# Altium PCB Battery_Monitor_4Cell.pcbdoc
Units mm, origin at the board's own origin, x right, y up, seen from the top; angles counter-clockwise.
Board outline 152.4 x 101.6 mm, 2 copper layers (Top Layer, Bottom Layer); 30 components, 24 nets, 102 pads, 0 vias.
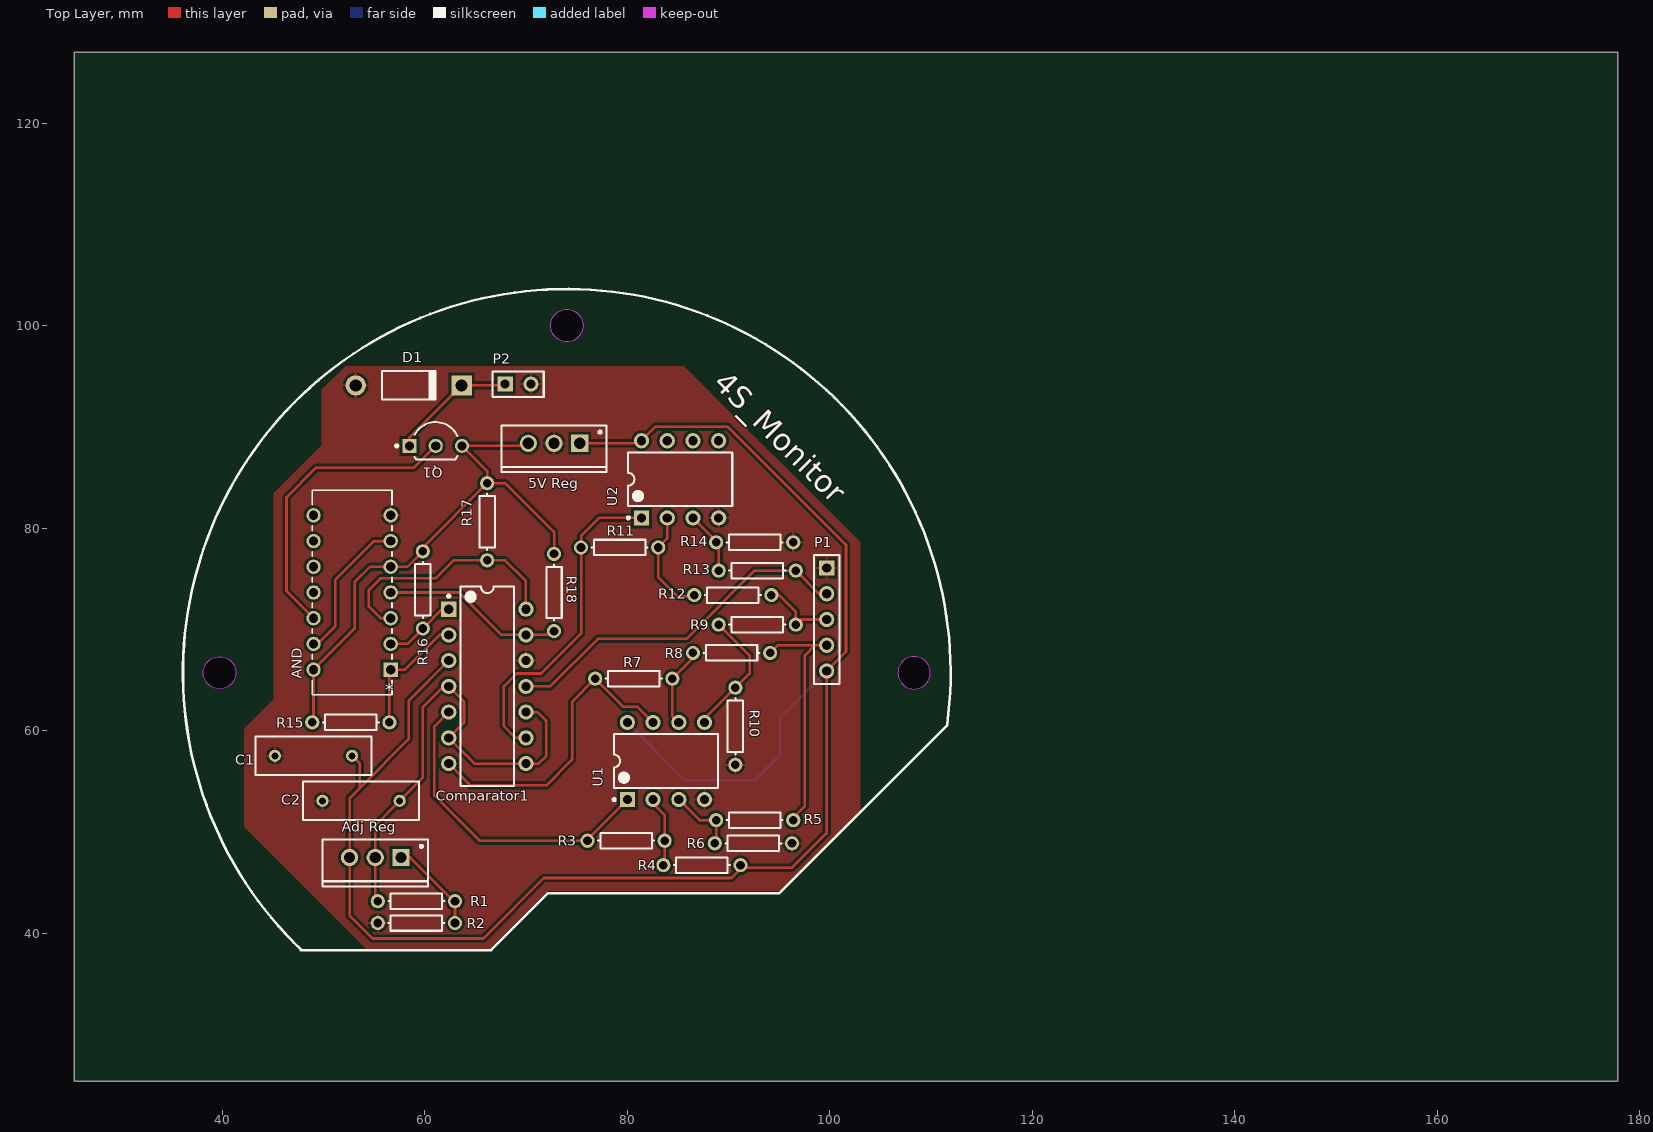
[diagram p0: Top Layer view]
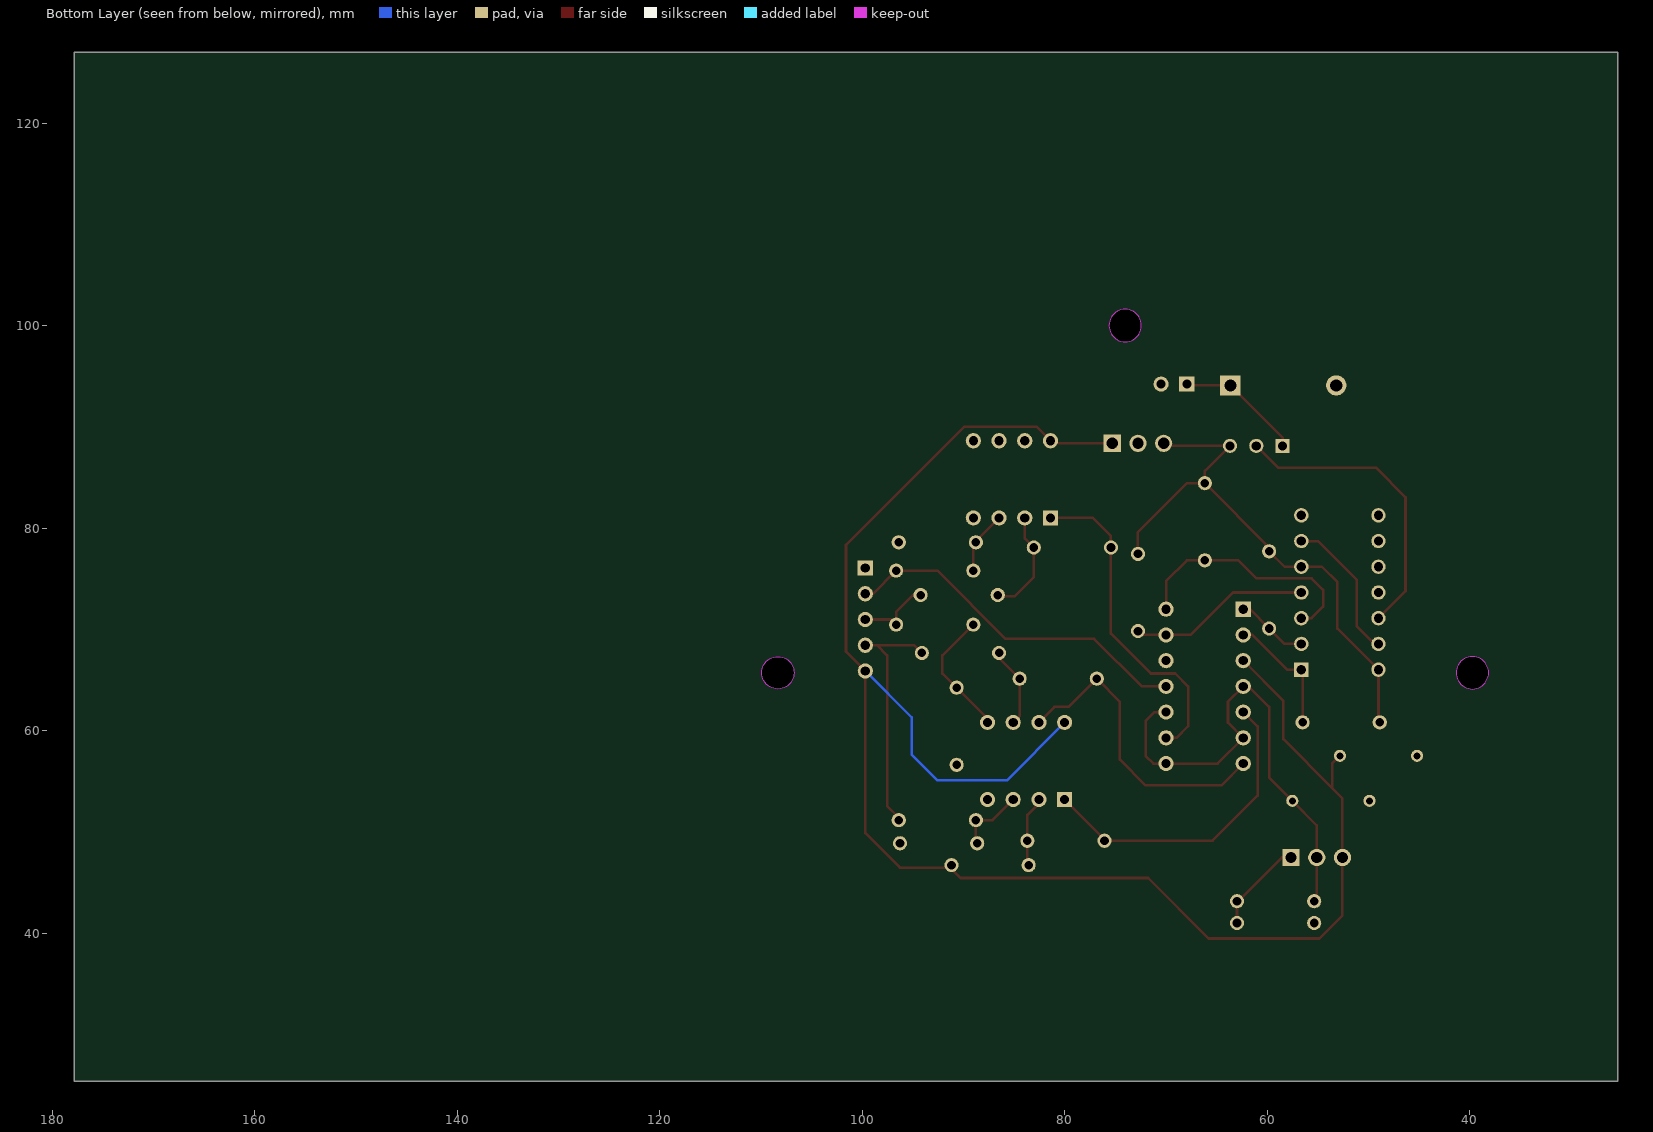
[diagram p1: Bottom Layer view, seen from below]

## Layer stack, top to bottom
Top Solder: solder mask 0.0102, Solder Resist, Dk 3.5
Top Layer: signal copper 0.0356
Dielectric 1: dielectric 0.32, FR-4, Dk 4.8
Bottom Layer: signal copper 0.0356
Bottom Solder: solder mask 0.0102, Solder Resist, Dk 3.5

## Board outline
25.4,25.4 177.8,25.4 177.8,127 25.4,127
cut-out: 39.742,64.13 cw(c39.742,65.73) 38.142,65.73 cw(c39.742,65.73) 39.742,67.33 cw(c39.742,65.73) 41.342,65.73 cw(c39.742,65.73)
cut-out: 106.722,65.73 ccw(c108.322,65.73) 108.322,64.13 ccw(c108.322,65.73) 109.922,65.73 ccw(c108.322,65.73) 108.322,67.33 ccw(c108.322,65.73)
cut-out: 74.032,98.42 cw(c74.032,100.02) 72.432,100.02 cw(c74.032,100.02) 74.032,101.62 cw(c74.032,100.02) 75.632,100.02 cw(c74.032,100.02)

## Design rules (kind name [scope] priority, off if disabled: settings)
Clearance [All] p1: gap=0.254
PolygonConnect [All] p1: connectstyle=Relief reliefconductorwidth=0.254 reliefentries=4 polygonreliefangle="90 Angle" airgapwidth=0.254
RoomDefinition Battery_Monitor_4Cell [InComponentClass('Battery_Monitor_4Cell')] p1: confinementstyle=ConfineIn formatcopy=TRUE lockcomponents=FALSE outline 154.051,116.84 22.733,116.84 22.733,26.67 154.051,26.67
RoutingVias [All] p1: holewidth=0.711 width=1.27 viastyle="Through Hole" minholewidth=0.711 minwidth=1.27 maxholewidth=0.711 maxwidth=1.27
SolderMaskExpansion [All] p1: expansion=0.102
Width [All] p1: maxlimit=0.254 minlimit=0.254 preferedwidth=0.254
30 further rules are at their usual default settings.

## Components (designator, comment, footprint, x,y, rotation, side; value= is the part's Value field where it differs from the comment)
"5V Reg" "L7805ABV" TO220 72.771,88.392 r180 top
"Adj Reg" "LM317T" TO-220 55.118,47.498 r180 top
AND "Part Number: SN54HC11J" J14 49.022,81.28 r180 top
C1 "Cap" RAD-0.3 49.022,57.531 r0 top
C2 "Cap" RAD-0.3 53.721,53.086 r180 top
Comparator1 "LM339N" N14A 66.184,64.389 r0 top
D1 "Diode 1N4002" DO-41 58.42,94.107 r0 top
P1 "Header 5" HDR1X5 99.695,76.073 r270 top
P2 "Relay" HDR1X2 67.945,94.234 r0 top
Q1 "PN2222ARLRA" ONSC-TO-92-3-29-11_AM_BL 61.087,88.138 r0 top
R1 "Res1" AXIAL-0.3 59.182,43.18 r180 top
R2 "Res1" AXIAL-0.3 59.182,41.021 r0 top
R3 "Res1" AXIAL-0.3 79.883,49.149 r180 top
R4 "Res1" AXIAL-0.3 87.376,46.736 r180 top
R5 "Res1" AXIAL-0.3 92.583,51.181 r180 top
R6 "Res1" AXIAL-0.3 92.456,48.895 r180 top
R7 "Res1" AXIAL-0.3 80.645,65.151 r180 top
R8 "Res1" AXIAL-0.3 90.297,67.691 r180 top
R9 "Res1" AXIAL-0.3 92.837,70.485 r180 top
R10 "Res1" AXIAL-0.3 90.678,60.452 r90 top
R11 "Res1" AXIAL-0.3 79.248,78.105 r180 top
R12 "Res1" AXIAL-0.3 90.424,73.406 r180 top
R13 "Res1" AXIAL-0.3 92.837,75.819 r180 top
R14 "Res1" AXIAL-0.3 92.583,78.613 r180 top
R15 "Res1" AXIAL-0.3 52.705,60.833 r180 top
R16 "Res1" AXIAL-0.3 59.817,73.914 r90 top
R17 "Res1" AXIAL-0.3 66.167,80.645 r90 top
R18 "Res1" AXIAL-0.3 72.771,73.66 r90 top
U1 "LMC662AIN" N08E 83.82,57.023 r90 top
U2 "LMC662AIN" N08E 85.217,84.836 r90 top

## Footprints (in the part's own frame and the unit in brackets; to place one, negate y for a bottom-side part, rotate by r counter-clockwise, add the part's x,y. Pads: shape width x height; smd on the part's side, far side on the other; paste and mask are expansions set on the pad)
AXIAL-0.3 [mm] "Axial Device, Thru-Hole; 2 Leads; 0.3 in Pin Spacing"
  round 1.4 hole 0.85: 1(-3.81,0) 2(3.81,0)
  silkscreen extent -2.77,-0.76 2.77,0.76
DO-41 [mm] "Diode, Axial; Body 5.2 x 2.7 mm (LxDia. max), Lead Dia. 0.86 mm (max)"
  round 2 hole 1.2: 1(-5.23,0)
  rect 2x2 hole 1.2: 2(5.23,0)
  silkscreen extent -2.65,-1.4 2.75,1.4
HDR1X2 [mm] "Connector; Header; 2 Position"
  rect 1.5x1.5 hole 0.9: 1(0,0)
  round 1.5 hole 0.9: 2(2.54,0)
  silkscreen extent -1.27,-1.27 3.81,1.27
HDR1X5 [mm] "Connector; Header; 5 Position"
  rect 1.5x1.5 hole 0.9: 1(0,0)
  round 1.5 hole 0.9: 2(2.54,0) 3(5.08,0) 4(7.62,0) 5(10.16,0)
  silkscreen extent -1.27,-1.27 11.43,1.27
J14 [mil]
  rect 56x56 hole 36 mask+0: 1(-300,600)
  round 56 hole 36 mask+0: 2(-300,500) 3(-300,400) 4(-300,300) 5(-300,200) 6(-300,100) 7(-300,0) 8(0,0) 9(0,100) 10(0,200) 11(0,300) 12(0,400) 13(0,500) 14(0,600)
  silkscreen extent -305,-98 5,698, body extent 0,0 10,10, height 10
N08E [mm] "DIP, 8-Pin, Row Spacing 7.62 mm, Pitch 2.54 mm"
  rect 1.5x1.5 hole 0.9: 1(-3.81,3.81)
  round 1.5 hole 0.9: 2(-3.81,1.27) 3(-3.81,-1.27) 4(-3.81,-3.81) 5(3.81,-3.81) 6(3.81,-1.27) 7(3.81,1.27) 8(3.81,3.81)
  silkscreen extent -3.93,-5.15 2.65,5.23, body extent -3.6,-5.15 3.6,5.15, height 5.34
N14A [mm] "DIP, 14-Pin, Row Spacing 7.62 mm, Pitch 2.54 mm"
  rect 1.5x1.5 hole 0.9: 1(-3.81,7.62)
  round 1.5 hole 0.9: 2(-3.81,5.08) 3(-3.81,2.54) 4(-3.81,0) 5(-3.81,-2.54) 6(-3.81,-5.08) 7(-3.81,-7.62) 8(3.81,-7.62) 9(3.81,-5.08) 10(3.81,-2.54) 11(3.81,0) 12(3.81,2.54) 13(3.81,5.08) 14(3.81,7.62)
  silkscreen extent -3.93,-9.85 2.65,9.85, body extent -3.55,-9.85 3.55,9.85, height 5.08
ONSC-TO-92-3-29-11_AM_BL [mm] "TO, 3-Leads, Body Dia 4.7mm, Pitch 2.6mm"
  rect 1.4x1.4 hole 0.9: 1(-2.6,0)
  round 1.4 hole 0.9: 2(0,0) 3(2.6,0)
  silkscreen extent -3.97,-1.34 2.13,2.35, body extent -2.84,-1.34 2.84,2.35, height 8.92
RAD-0.3 [mm] "Radial Cap, Thru-Hole; 2 Leads; 0.3 in Pin Spacing"
  round 1.2 hole 0.7: 1(-3.81,0) 2(3.81,0)
  silkscreen extent -5.71,-1.91 5.71,1.91
TO220 [mm] "TO, Thru-Hole, Vertical, Heatsink Mounted; 3 In-Line Leads; Pitch 2.54 mm"
  rect 1.7x1.7 hole 1.1: 1(-2.54,0)
  round 1.7 hole 1.1: 2(0,0) 3(2.54,0)
  silkscreen extent -5.2,-1.75 5.2,2.85, body extent -5.25,-1.8 5.25,2.9, height 19.7
TO-220 [mm] "TO, Thru-Hole, Vertical, Heatsink Mounted; 3 In-Line Leads; Pitch 2.54 mm"
  rect 1.7x1.7 hole 1.1: 1(-2.54,0)
  round 1.7 hole 1.1: 2(0,0) 3(2.54,0)
  silkscreen extent -5.2,-1.75 5.2,2.85, body extent -5.25,-1.8 5.25,2.9, height 19.7

## Part data
"5V Reg": "Positive Voltage Regulator, 5V, 3-Pin TO-220"
"Adj Reg": "1.5A, 1.2V to 37V Adjustable Voltage Regulator, 3-Pin TO-220"
AND: library part SN54HC11J, "No Description Available"
C1 C2: "Capacitor"
Comparator1: "Low Power Low Offset Voltage Quad Comparator, 14-pin MDIP"
D1: "1 Amp General Purpose Rectifier"
P1: "Header, 5-Pin"
P2: library part "Header 2", "Header, 2-Pin"
Q1: "General Purpose Transistor, NPN Silicon, 3-Pin TO-92, Tape and Reel"
R1 R2 R3 R4 R5 R6 R7 R8 R9 R10 R11 R12 R13 R14 R15 R16 R17 R18: "Resistor"
U1 U2: "CMOS Dual Operational Amplifier, 8-pin MDIP"

## Nets (pads, with @x,y where several pads share a name; then routed paths per layer and width w, separated by ;. In a path a pad name is that pad's centre, name@x,y a point inside that pad or via, vN(x,y) a via of type N, cw(c..) or ccw(c..) an arc to the next point about the centre after c; other vN are vias at no path point)
3.6V: "Adj Reg.2" C2.1 Comparator1.4 Comparator1.6 Comparator1.8 Comparator1.10 R1.2 | length 47.9
  Top Layer w0.254: R1.2@55.626,43.18 55.118,43.688 55.118,47.498 55.118,50.673 C2.1 59.817,55.372 59.817,62.357 61.849,64.389 Comparator1.4 63.881,62.882 63.881,60.816 Comparator1.6 64.914,56.769 Comparator1.8 71.247,56.769 72.009,57.531 72.009,60.96 71.12,61.849 Comparator1.10
"3.7 V": Comparator1.11 P1.2 R13.1 | length 35.4
  Top Layer w0.254: Comparator1.11 72.39,64.389 77.089,69.088 85.852,69.088 92.583,75.819 R13.1 98.933,73.533 P1.2
5V: "5V Reg.3" AND.5 AND.14 Q1.3 R15.2 R16.2 R17.2 R18.2 | length 55.1
  Top Layer w0.254: R15.2 49.022,60.96 AND.14 53.086,70.104 53.086,74.676 54.61,76.2 AND.5 58.293,76.2 R16.2 59.817,78.105 R17.2 ; 70.231,88.392 69.977,88.138 Q1.3 66.167,85.658 R17.2 ; R18.2 72.771,79.629 67.945,84.455 R17.2
7.4V: P1.3 R9.1 R12.1 | length 7.8
  Top Layer w0.254: R12.1@94.234,72.898 94.742,73.406 94.996,73.406 96.647,71.755 R9.1 97.155,70.993 P1.3
"11.1 V": P1.4 R5.1 R8.1 | length 24.1
  Top Layer w0.254: R8.1 94.869,68.453 98.552,68.453 ; R5.1 96.393,51.435 97.536,52.578 97.536,67.437 98.552,68.453 ; P1.4 98.552,68.453
"14.8 V": "5V Reg.1" "Adj Reg.3" C1.2 Comparator1.3 P1.5 R4.1 U1.8 U2.8 | length 174.8
  Top Layer w0.254: C1.2 53.594,56.769 53.594,54.356 ; Comparator1.3 58.413,62.968 58.413,59.175 53.594,54.356 ; 75.311,88.392 81.153,88.392 U2.8 82.804,90.043 89.916,90.043 101.6,78.359 101.6,67.818 P1.5 99.695,49.911 96.266,46.482 91.313,46.482 90.297,45.466 71.755,45.466 65.786,39.497 54.864,39.497 52.578,41.783 52.578,47.498 52.578,53.34 53.594,54.356
  Bottom Layer w0.254: U1.8 85.725,55.118 92.583,55.118 95.123,57.658 95.123,61.341 P1.5
AND_OUTPUT: AND.12 Q1.2 | length 29.9
  Top Layer w0.254: AND.12 46.355,73.787 46.355,83.058 49.276,85.979 58.928,85.979 Q1.2
CELL2: Comparator1.9 R11.2 U2.1 | length 32.7
  Top Layer w0.254: Comparator1.9 68.961,59.309 67.818,60.452 67.818,64.389 69.088,65.659 71.501,65.659 75.438,69.596 R11.2 75.438,79.248 77.216,81.026 U2.1
CELL3: Comparator1.7 R7.2 U1.7 | length 30.6
  Top Layer w0.254: Comparator1.7 64.533,54.61 72.009,54.61 74.549,57.15 74.549,62.865 R7.2 79.629,62.357 81.026,62.357 U1.7
CELL4: Comparator1.5 R3.2 U1.1 | length 31.5
  Top Layer w0.254: Comparator1.5 60.96,60.435 60.96,53.594 65.405,49.149 75.946,49.149 R3.2@76.073,49.276 ; R3.2 R3.2@76.073,49.276 ; U1.1 R3.2@76.073,49.276
GND: "5V Reg.2" AND.7 C1.1 C2.2 Comparator1.12 D1.1 P1.1 P2.2 R2.1 R6.1 R10.1 R14.1 U1.4 U2.4
"NetAdj Reg_1": "Adj Reg.1" R1.1 R2.2 | length 9.2
  Top Layer w0.254: 57.658,47.498 58.547,47.498 62.992,43.053 R2.2
NetAND_1: AND.1 Comparator1.2 R15.1 | length 12.4
  Top Layer w0.254: R15.1 56.515,65.913 AND.1 58.039,66.04 61.468,69.469 Comparator1.2
NetAND_2: AND.2 Comparator1.1 R16.1 | length 7.3
  Top Layer w0.254: AND.2 58.293,68.58 R16.1 61.722,72.009 Comparator1.1 Comparator1.1@62.247,72.136
NetAND_3: AND.3 Comparator1.14 R17.1 | length 24.8
  Top Layer w0.254: AND.3 55.626,71.12 54.483,72.263 54.483,73.914 55.626,75.057 61.087,75.057 62.865,76.835 R17.1 67.945,76.835 69.994,74.786 Comparator1.14 Comparator1.14@69.867,72.136
NetAND_4: AND.4 Comparator1.13 R18.1 | length 18
  Top Layer w0.254: AND.4 63.373,73.66 67.564,69.469 Comparator1.13 72.39,69.469 R18.1
NetAND_6: AND.6 AND.13 | length 14.5
  Top Layer w0.254: AND.13 49.403,68.58 51.181,70.358 51.181,74.93 54.991,78.74 AND.6
NetD1_2: D1.2 P2.1 Q1.1 | length 12.5
  Top Layer w0.254: Q1.1 58.487,88.944 D1.2 67.818,94.107 P2.1
NetR3_1: R3.1 R4.2 U1.2 | length 7.2
  Top Layer w0.254: U1.2 82.55,52.832 83.693,51.689 R3.1 R4.2@83.693,46.482
NetR5_2: R5.2 R6.2 U1.3 | length 7.2
  Top Layer w0.254: U1.3 87.122,51.181 R5.2 R6.2@88.773,48.514
NetR7_1: R7.1 R8.2 U1.6 | length 8
  Top Layer w0.254: U1.6 84.455,61.468 R7.1 86.487,67.183 R8.2
NetR9_2: R9.2 R10.2 U1.5 | length 12.8
  Top Layer w0.254: U1.5 87.63,61.214 R10.2 92.075,65.659 92.075,67.437 R9.2
NetR11_1: R11.1 R12.2 U2.2 | length 10.7
  Top Layer w0.254: U2.2 83.947,78.994 R11.1 83.058,75.184 84.963,73.279 86.233,73.279 R12.2@86.614,72.898
NetR13_2: R13.2 R14.2 U2.3 | length 6.3
  Top Layer w0.254: U2.3 88.773,78.74 R14.2 89.027,78.359 R13.2
pads on no net: AND.8 AND.9 AND.10 AND.11 U2.5 U2.6 U2.7

## Polygon pours and split planes (outlines as drawn)
GND on Top Layer "GND" (solid, pour order 0): 49.847,93.662 52.197,96.012 85.598,96.012 102.997,78.613 102.997,51.816 94.996,44.196 72.136,44.196 66.421,38.481 54.229,38.481 42.164,50.546 42.164,60.198 45.085,63.119 45.085,70.49 45.085,83.439 49.847,88.201

## Silkscreen, mask and mechanical layers (free items; w line width, h text height)
Top Overlay:
  lines w0.254: 47.786,38.354 66.548,38.354 72.136,43.942 94.996,43.942 111.611,60.557 ; 47.786,38.389 cw(c74.032,65.73) 111.581,60.586
  text "4S_Monitor" at 88.392,94.234 h2.2 r315
Mechanical 1:
  circle w0.254: c39.742,65.73 r1.6
  circle w0.254: c108.322,65.73 r1.6
  circle w0.254: c74.032,100.02 r1.6

## Text inside footprints (layer, text, board x,y; h text height)
AND: Top Overlay "*" at 56.959,65.202 h1.27 r180; Mechanical 7 "0.3in/7.62mm" at 54.737,84.963 h0.64 r180; Mechanical 13 "*" at 56.706,66.675 h1.27 r180